# EAGLE board PhatStats Slim Enclosure QTPY PCB  v0.93 (EAGLE 7.6.0)
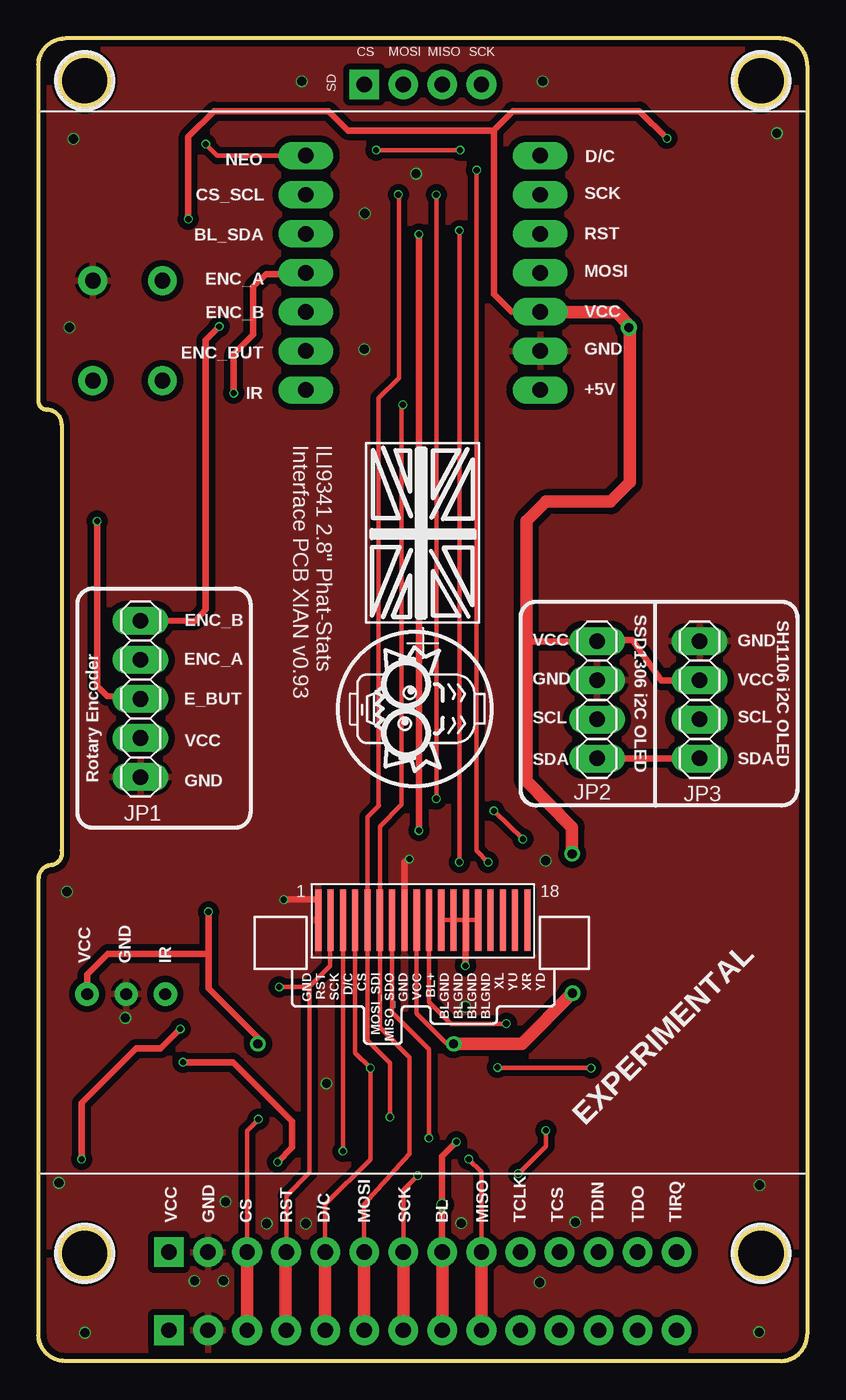
[diagram p0: board, top side]
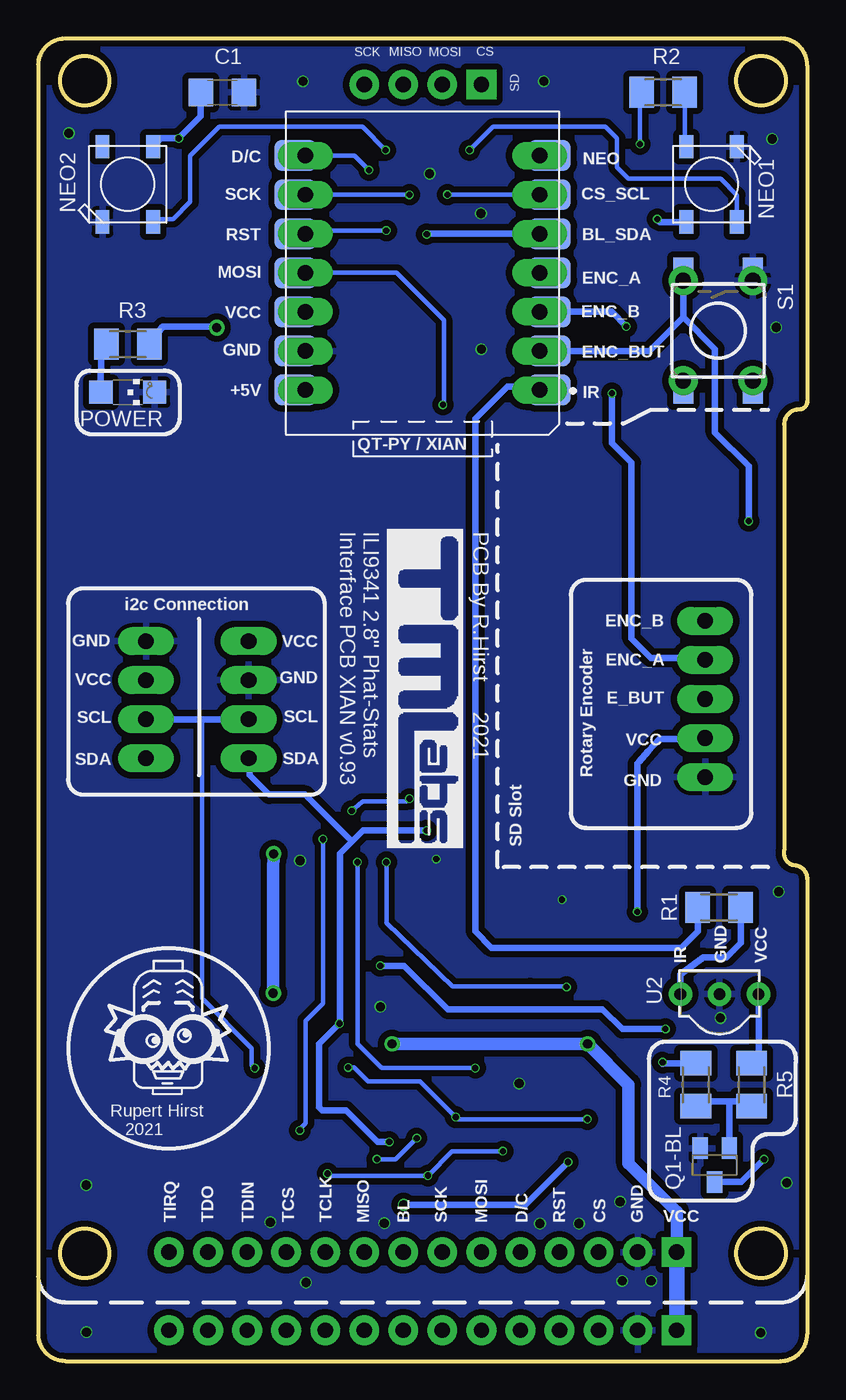
[diagram p1: board, bottom side, seen from below]

Size 50 x 86 mm. Coordinates in mm from the lower left corner, seen from the top.
Outline: 50,84.27 50,1.73 arc-90 48.27,0 1.73,0 arc-90 0,1.73 0,31.35 arc-90 0.9,32.25 arc90 1.5,33.23 1.5,60.9 arc90 0.52,61.88 arc-90 0,62.4 0,84.27 arc-90 1.73,86 48.27,86 arc-90 50,84.27
Outline: circle at 47,83.25 radius 1.6
Outline: circle at 47,7 radius 1.6
Outline: circle at 3,83.25 radius 1.6
Outline: circle at 3,7 radius 1.6
Copper layers (1*16): Top 0.035mm / dielectric 1.6mm / Bottom 0.035mm
Design rules "jlcpcb-2layers": minimum track width 5mil, minimum drill 0.3mm, track to track 5mil, track to pad 5mil, pad to pad 5mil, via to via 5mil, smd to smd 5mil, copper to edge 0.2mm, drill to drill 6mil, minimum pad ring 10mil, minimum via ring 3mil, stop-mask expansion 4mil, vias tented up to drill 0mil, thermal gap 10mil

## Footprints (pad centres in the part's own frame; a part is rotated, then mirrored left to right if it is on the bottom)
ILI9341-2.8 = smd 4 x 0.4: P$1 -18,6.8; P$2 -18,6; P$3 -18,5.2; P$4 -18,4.4; P$5 -18,3.6; P$6 -18,2.8; P$7 -18,2; P$8 -18,1.2; P$9 -18,0.4; P$10 -18,-0.4; P$11 -18,-1.2; P$12 -18,-2; P$13 -18,-2.8; P$14 -18,-3.6; P$15 -18,-4.4; P$16 -18,-5.2; P$17 -18,-6; P$18 -18,-6.8
C1206 = smd 1.6 x 1.8: 1 -1.4,0; 2 1.4,0
1X05 = drill 1.016 long: 1 -5.08,0; 2 -2.54,0; 3 0,0; 4 2.54,0; 5 5.08,0
1X04 = drill 1.016 long: 1 -3.81,0; 2 -1.27,0; 3 1.27,0; 4 3.81,0
WS2812B = smd 1.5 x 0.9: 1-VDD 2.45,-1.65; 2-DOUT 2.45,1.65; 3-GND -2.45,1.65; 4-DIN -2.45,-1.65
CHIPLED_1206 = smd 1.5 x 1.5: A 0,-1.75; C 0,1.75
SOT23-BEC = smd 1 x 1.4: B -0.95,-1.1; C 0,1.1; E 0.95,-1.1
M1206 = smd 1.6 x 2: 1 -1.4,0; 2 1.4,0
TACTILE_SWITCH_PTH_6.0MM = drill 1.016 pad 1.88: 1 -3.251,2.261; 2 3.251,2.261; 3 -3.251,-2.261; 4 3.251,-2.261
TACTILE_SWITCH_SMD_6.2MM_TALL = smd 1.55 x 1.3: A1 -3.975,-2.25; A2 3.975,-2.25; B1 -3.975,2.25; B2 3.975,2.25
MOUDLE14P-2.54-21X17.8MM = smd 2.75 x 2: 1 -2.54,15.24; 2 -2.54,12.7; 3 -2.54,10.16; 4 -2.54,7.62; 5 -2.54,5.08; 6 -2.54,2.54; 7 -2.54,0; 8 13.97,0; 9 13.97,2.54; 10 13.97,5.08; 11 13.97,7.62; 12 13.97,10.16; 13 13.97,12.7; 14 13.97,15.24 | drill 1 pad 1.676 long: P$1 -1.905,15.24; P$2 -1.905,12.7; P$3 -1.905,10.16; P$4 -1.905,7.62; P$5 -1.905,5.08; P$6 -1.905,2.54; P$7 -1.905,0; P$8 13.335,0; P$9 13.335,2.54; P$10 13.335,5.08; P$11 13.335,7.62; P$12 13.335,10.16; P$13 13.335,12.7; P$14 13.335,15.24
TSOP382 = drill 0.762 pad 1.524: 1 -2.54,0; 2 0,0; 3 2.54,0
2.8_TFT = drill 1 pad 1.93: BL 26.27,2; CS 13.57,2; D/C 18.65,2; GND 11.03,2; MISO 28.81,2; MOSI 21.19,2; RST 16.11,2; SCK 23.73,2; SD_MISO 26.27,83; SD_MOSI 23.73,83; SD_SCK 28.81,83; T_CLK 31.35,2; T_CS 33.89,2; T_DIN 36.43,2; T_DO 38.97,2; T_IRQ 41.51,2 | drill 1 pad 1.93 square: SD_CS 21.19,83; VCC 8.49,2
2.8_TFT' = drill 1 pad 1.93: BL 26.27,2; CS 13.57,2; D/C 18.65,2; GND 11.03,2; MISO 28.81,2; MOSI 21.19,2; RST 16.11,2; SCK 23.73,2; T_CLK 31.35,2; T_CS 33.89,2; T_DIN 36.43,2; T_DO 38.97,2; T_IRQ 41.51,2 | drill 1 pad 1.93 square: VCC 8.49,2

## Placement (x,y rotation side)
0  ILI9341-2.8  [ILI9341-2.8]  25,46.68 90 top
C1  0.1uf  [C1206]  38.03,82.49 180 bottom
JP1  [1X05]  6.64,43.05 90 top
JP2  [1X04]  36.33,43 270 top
JP3  [1X04]  43,43 270 top
NEO1  WS2812B5050  [WS2812B]  6.22,76.52 270 bottom
NEO2  WS2812B5050  [WS2812B]  44.19,76.52 90 bottom
POWER  [CHIPLED_1206]  44.19,63 270 bottom
Q1-BL  BC817-16LT1SMD  [SOT23-BEC]  6.02,12.74 180 bottom
R1  150  [M1206]  5.74,29.49 0 bottom
R2  150  [M1206]  9.38,82.5 180 bottom
R3  680r  [M1206]  44.19,66.12 0 bottom
R4  1k  [M1206]  7.25,17.97 90 bottom
R5  10k  [M1206]  3.62,17.97 90 bottom
S1  [TACTILE_SWITCH_PTH_6.0MM]  5.8,67 270 bottom
S3  MOMENTARY-SWITCH-SPST-SMD-6.2MM-TALL  [TACTILE_SWITCH_SMD_6.2MM_TALL]  5.8,67 90 bottom
U1  [MOUDLE14P-2.54-21X17.8MM]  19.3,78.38 180 bottom
U2  38kHz  [TSOP382]  5.71,23.86 0 bottom
U$1  [TMSLOGO_PROF_UNION_LRG]  21.08,61.91 270 top
U$3  2.8_TFT  [2.8_TFT]  0,0 0 top
U$5  2.8_TFT  [2.8_TFT']  0,5.08 0 top
U$6  [MADPROF]  43.84,17.09 0 bottom
U$9  [TMSLOGO_INVERTED]  28.66,54.72 270 bottom

## Library data of the parts
0 = TML_ili9341_0.8Pitch_Header
C1 = rcl; SPICEPREFIX: C
JP1-JP3 = pinhead
NEO1 NEO2 POWER = adafruit
Q1-BL = transistor-npn
R1-R5 = resistor
S1 = SparkFun-Switches; PROD_ID: SWCH-08441; SF_SKU: COM-00097
S3 = SparkFun-Switches; PROD_ID: SWCH-11966; SF_SKU: COM-12992
U1 = TML_Seeeduino XIAO_QTPY_ThroughHole_LongPad
U2 = SparkFun-Sensors; PROD_ID: SEN-10266
U$1 U$9 = TML_Logos
U$3 = TML_ili9341-2.8_tft-display_Corrected
U$5 = TML_ili9341-2.8_tft-display_PinHeader only
U$6 = TML_MADPROF_LOGO

## Nets
BACKLIGHT_SDA: 0.P$10 JP2.4 JP3.4 R4.2 U1.P$5 U$3.BL U$5.BL
BLGND: 0.P$11 0.P$12 0.P$13 0.P$14 Q1-BL.C
CS_SCL: 0.P$5 JP2.3 JP3.3 U1.P$6 U$3.CS U$5.CS
DC: 0.P$4 U1.P$8 U$3.D/C U$5.D/C
ENC_A: JP1.4 U1.P$4
ENC_B: JP1.5 U1.P$3
ENC_BUTTON: JP1.3 S1.3 S3.B2 U1.P$2
GND: 0.P$1 0.P$8 C1.1 JP1.1 JP2.2 JP3.1 NEO1.3-GND NEO2.3-GND POWER.C Q1-BL.E S1.1 S3.A2 U1.P$13 U2.2 U$3.GND U$5.GND
IR: R1.1 U1.P$1
MISO: 0.P$7 U$3.MISO U$5.MISO
MOSI: 0.P$6 U1.P$11 U$3.MOSI U$5.MOSI
N$1: POWER.A R3.1
N$2: Q1-BL.B R4.1 R5.1
N$3: R1.2 U2.1
N$4: NEO1.4-DIN R2.1
NEO: R2.2 U1.P$7
NEODATA: NEO1.2-DOUT NEO2.4-DIN
RST: 0.P$2 U1.P$10 U$3.RST U$5.RST
SCK: 0.P$3 U1.P$9 U$3.SCK U$5.SCK
T_XL: 0.P$15
T_XR: 0.P$17
T_YD: 0.P$18
T_YU: 0.P$16
VCC: 0.P$9 C1.2 JP1.2 JP2.1 JP3.2 NEO1.1-VDD NEO2.1-VDD R3.2 R5.2 U1.P$12 U2.3 U$3.VCC U$5.VCC

## Tracks (layer width: path | path; a pad name or v marks a point on that pad's centre or on a via)
BACKLIGHT_SDA  (via drill 0.4, 0.6)
  Top 0.305: 0.P$10 25.4,23.37 26.85,21.92 30.4,21.92 v30.42,21.95
  Top 0.406: v24.75,73.27 v24.75,34.5 | JP2.4 37.12,39.19 38.25,39.19 38.62,39.19 JP3.4 | U$5.BL 26.25,7.1 v26.25,10.16 26.25,13.31 v27.19,14.25 | v9.41,19.43 12.66,19.43 16.51,15.57 16.51,13.88 v15.56,12.94
  Top 0.813: U$3.BL U$5.BL
  Bottom 0.305: v30.42,21.95 30.38,22.12 | 36.27,39.19 JP2.4
  Bottom 0.406: 30.38,22.12 30.38,33 29.59,33.78 | 29.59,33.78 28.88,34.5 v24.75,34.5 | U1.P$5 24.75,73.3 v24.75,73.27 | 29.59,33.78 32.65,36.83 35,36.83 36.27,38.1 36.27,39.19 | v27.19,14.25 27.94,14.25 30,16.31 31.55,16.31 31.75,16.51 31.75,20.62 v30.42,21.95 | v26.25,10.16 18.34,10.16 v15.56,12.94 | R4.2 9.32,19.37 9.38,19.31 9.41,19.32 v9.41,19.43
BLGND  (via drill 0.4)
  Top 0.305: 0.P$14 0.P$13 0.P$12 0.P$11
  Top 0.406: 0.P$13 27.77,28.68 v27.77,25.7 | v2.81,13.12 2.81,16.78 6.35,20.32 7.95,20.32 v9.22,21.59
  Bottom 0.406: v9.22,21.59 12.03,21.59 13.31,22.88 13.33,22.86 23.38,22.86 26.23,25.7 v27.77,25.7 | Q1-BL.C 4.29,11.64 v2.81,13.12
CS_SCL  (via drill 0.4)
  Top 0.305: v22.86,15.86 22.86,19.38 21.4,20.84 0.P$5 21.41,35.38 22.15,36.12 22.12,36.15 22.12,62.61 23.44,63.92 23.44,75.81 v23.41,75.84 | U$5.CS 13.57,14.98 v14.3,15.72 | v35.94,19.05 29.9,19.05 v29.86,19.09
  Top 0.813: U$3.CS U$5.CS
  Bottom 0.305: v23.41,75.84 U1.P$6 | v14.3,15.72 22.71,15.72 v22.86,15.86 25.18,18.19 28.58,18.19 29.48,19.09 v29.86,19.09 | 39.37,41.73 39.37,23.57 36.12,20.32 36.12,19.24 v35.94,19.05
  Bottom 0.406: JP2.3 39.37,41.73 JP3.3
DC  (via drill 0.4)
  Top 0.305: 0.P$4 20.6,20.04 v21.59,19.05 21.59,13.12 18.65,10.18 U$5.D/C | v29.25,32.44 28.5,33.19 v28.5,77.44
  Top 0.813: U$3.D/C U$5.D/C
  Bottom 0.305: U1.P$8 29.44,78.38 v28.5,77.44 | v21.59,19.05 27.68,19.05 29.25,20.62 v29.25,32.44
ENC_A  (via drill 0.4)
  Top 0.406: v12.7,62.94 12.7,65.48 13.97,66.75 13.97,69.85 14.81,70.69 17.25,70.69 U1.P$4
  Bottom 0.406: JP1.4 6.35,45.72 10.16,45.72 11.43,46.99 11.43,58.42 12.7,59.69 v12.7,62.94
ENC_B  (via drill 0.4)
  Top 0.406: JP1.5 10.22,48.16 10.88,48.87 10.88,66.38 v11.76,67.27
  Bottom 0.406: U1.P$3 12.71,68.22 v11.76,67.27
ENC_BUTTON  (via drill 0.4)
  Top 0.406: JP1.3 4.47,43.23 3.81,43.89 v3.81,54.61
  Bottom 0.406: S3.B2 8.26,70.96 S1.3 8.06,67.88 | v3.81,54.61 3.81,58.19 6,60.38 6,65.81 8.06,67.88 | U1.P$2 10.26,65.68 8.06,67.88
GND  (via drill 0.4, 0.6)
  Top 0.406: 0.P$1 18.21,30 v15.95,30 | 0.P$8 23.8,32.46 v24.13,32.65
  other vias: 46.9,11.44 46.88,1.88 1.34,11.59 3.02,1.84 12.03,5.21 2.02,67.21 48.02,79.84 2.27,79.47 1.85,30.52 12.17,10.36 10.15,5.21 5.64,22.32 17.13,83.22 32.8,83.22 27.76,23.04 34.91,9.03 27.5,8.96 18.73,18.05 24.56,77.21 21.22,74.62 21.19,65.79 14.84,8.94 32.98,32.53 17.38,8.94 32.6,5.11
  pour Bottom (isolate 0.406): -1.27,-1.27 -1.27,87.63 50.8,87.63 50.8,-1.27
  pour Top (isolate 0.406): -2.54,-2.54 -2.54,88.9 52.07,88.9 52.07,-2.54
IR
  Bottom 0.406: U1.P$1 17.63,63.38 19.5,63.38 21.59,61.28 21.59,27.94 20.52,26.88 8.19,26.88 7.12,27.94 7.12,29.48 R1.1
MISO  (via drill 0.4)
  Top 0.305: 0.P$7 23,22.68 25.4,20.28 v25.4,14.49 | v27.98,13.12 28.81,12.29 U$5.MISO
  Top 0.813: U$3.MISO U$5.MISO
  Bottom 0.305: v25.4,14.49 26.77,13.12 v27.98,13.12
MOSI  (via drill 0.4)
  Top 0.305: U$5.MOSI 21.19,7.26 21.19,10.19 24.13,13.47 24.13,19.76 22.2,21.69 0.P$6 22.2,34.69 22.2,34.77 23.62,36.19 23.62,62.11 v23.7,62.19
  Top 0.813: U$3.MOSI U$5.MOSI
  Bottom 0.305: U1.P$11 26.7,70.76 23.62,67.69 23.62,62.07 v23.7,62.19
N$1
  Bottom 0.406: POWER.A 45.91,65.52 46.09,65.81 R3.1
N$2
  Bottom 0.406: Q1-BL.B 5.25,14.26 5.06,14.26 5.06,16.88 | 5.06,16.88 3.62,16.88 R5.1 | 5.06,16.88 7.25,16.88 R4.1
N$3
  Bottom 0.406: U2.1 8.24,25.13 6.75,26.25 5.25,26.25 4.31,27.19 4.31,29.46 R1.2
N$4
  Bottom 0.305: 7.97,78.97 R2.1
  Bottom 0.406: NEO1.4-DIN 7.97,78.97
NEO  (via drill 0.4)
  Top 0.305: U1.P$7 16.88,78.38 11.62,78.38 v10.88,79.12
  Bottom 0.305: 10.88,82.5 v10.88,79.12
  Bottom 0.406: R2.2 10.88,82.5
NEODATA  (via drill 0.4)
  Top 0.305: v27.42,78.74 v21.96,78.74
  Bottom 0.305: NEO1.2-DOUT 4.57,75.82 5.62,76.88 11.62,76.88 12.38,77.62 12.38,79.5 13.12,80.25 20.45,80.25 v21.96,78.74 | NEO2.4-DIN 42.35,74.25 41.25,74.25 40.12,75.38 40.12,78.38 38.25,80.25 28.93,80.25 v27.42,78.74
RST  (via drill 0.4)
  Top 0.254: 16.11,2.02 16.09,2
  Top 0.305: U$3.RST 16.09,2 | 0.P$2 18.98,25.7 17.63,24.35 | 16.14,7.25 16.12,7.12 U$5.RST 16.12,7.47 16.12,10.76 17.63,12.26 17.63,24.35 | v27.38,73.5 v27.38,32.44 | v15.65,24.32 17.6,24.32 17.63,24.35
  Top 0.813: 16.09,2 16.09,7.06 U$5.RST
  Bottom 0.305: v27.38,32.44 27.38,28.5 23.06,24.38 18.03,24.38 17.64,24.36 15.69,24.36 v15.65,24.32 | v27.38,73.5 32.44,73.5 U1.P$10
SCK  (via drill 0.4)
  Top 0.305: 0.P$3 v19.8,13.64 | v25.88,75.84 v25.88,36.56 | U$5.SCK 23.73,11.12 v24.67,12.06 | v29.62,35.77 v31.5,33.94 | v31.21,12.2 31.25,12.2 33.02,13.97 33.02,14.98 v33,15
  Top 0.813: U$3.SCK U$5.SCK
  Bottom 0.305: U1.P$9 v25.88,75.84 | v31.21,12.2 31.06,12.05 v24.68,12.05 v24.67,12.06 23.09,13.64 v19.8,13.64 | v33,15 33,15.09 32.62,15.46 32.62,22.12 31.5,23.25 v31.5,33.94 | v29.62,35.77 28.92,36.38 26.06,36.38 v25.88,36.56
T_XL
  Top 0.305: 29.44,28.64 0.P$15
T_YU
  Top 0.305: 30.19,28.67 0.P$16
VCC  (via drill 0.4, 0.6 pad 1, 0.6 pad 1.02)
  Top 0.305: 0.P$9 24.6,22.6 26.58,20.62 v27,20.62
  Top 0.406: U2.3 3.17,25.14 4.51,26.48 11.05,26.48 | v9.75,74.25 9.75,79.6 11.43,81.28 18.86,81.28 20.13,80.01 29.59,80.01 | v40.88,79.5 39.09,81.28 30.86,81.28 29.59,80.01 | 29.59,80.01 29.62,80.01 29.62,69.38 30.78,68.22 U1.P$12 | v11.05,29.21 11.05,26.48 | 11.05,26.48 11.05,24.22 14.28,21 v14.28,20.62 | JP3.2 42.94,44.25 40.5,44.25 38.62,46.88 36.38,46.88 | 36.38,46.88 JP2.1 | 36.38,46.88 36.31,46.8 31.75,46.8
  Top 0.813: v34.71,32.98 34.71,34.7 31.75,37.73 31.75,46.8 31.75,54.61 33.02,55.88 37.2,55.88 38.48,57.15 38.48,67.31 | v27,20.62 31.43,20.62 v34.73,23.93 | 38.48,67.31 v38.4,67.19 38.48,66.94 | 38.48,67.31 37.58,68.2 33.02,68.2 U1.P$12
  Bottom 0.406: NEO1.1-VDD 9.57,74.07 v9.75,74.25 | NEO2.1-VDD 42.01,79.5 v40.88,79.5 39.44,80.94 C1.2 | v11.05,29.21 11.05,38.85 10.96,38.95 10.33,39.66 9.62,40.45 6.7,40.45 JP1.2 | 3.19,23.96 3.19,23.84 U2.3 3.17,19.74 R5.2 | R3.2 41.91,67.27 38.66,67.27 v38.4,67.19
  Bottom 0.61: 8.44,7.5 8.49,7.12 U$5.VCC
  Bottom 0.813: v34.71,32.98 34.73,31.83 v34.73,23.93 | v27,20.62 v14.28,20.62 11.62,17.97 11.62,12.85 8.49,9.72 U$5.VCC
  Bottom 1.016: U$3.VCC U$5.VCC

## Text on the board
tPlace: NEO | D/C | CS_SCL | SCK | BL_SDA | RST | ENC_A | MOSI | ENC_B | VCC | ENC_BUT | GND | IR | +5V | ILI9341 2.8" Phat-Stats / Interface PCB XIAN v0.93 | SSD1306 i2C OLED | ENC_B | SH1106 i2C OLED | VCC | GND | ENC_A | GND | VCC | E_BUT | SCL | SCL | VCC | SDA | SDA | Rotary Encoder | GND | VCC | GND | IR | GND | RST | SCK | D/C | CS | MOSI_SDI | MISO_SDO | GND | VCC | BL+ | BLGND | BLGND | BLGND | BLGND | XL | YU | XR | YD | EXPERIMENTAL | VCC | GND | CS | RST | D/C | MOSI | SCK | BL | MISO | TCLK | TCS | TDIN | TDO | TIRQ
bPlace: D/C | NEO | CS_SCL | SCK | RST | BL_SDA | MOSI | ENC_A | VCC | ENC_B | GND | ENC_BUT | +5V | IR | QT-PY / XIAN | PCB By R.Hirst 2021 | ILI9341 2.8" Phat-Stats / Interface PCB XIAN v0.93 | ENC_B | i2c Connection | VCC | GND | ENC_A | GND | VCC | E_BUT | SCL | SCL | VCC | SDA | SDA | GND | Rotary Encoder | SD Slot | VCC | GND | IR | Rupert Hirst / 2021 | VCC | GND | CS | RST | D/C | MOSI | SCK | BL | MISO | TCLK | TCS | TDIN | TDO | TIRQ